# Altium PCB TI TPS56837.PcbDoc
Units mm, origin at the board's own origin, x right, y up, seen from the top; angles counter-clockwise.
Board outline 50 x 20 mm, 4 copper layers (Top Layer, Mid Layer 1, Mid Layer 2, Bottom Layer), stack 1.57 mm thick; 19 components, 10 nets, 49 pads, 53 vias.
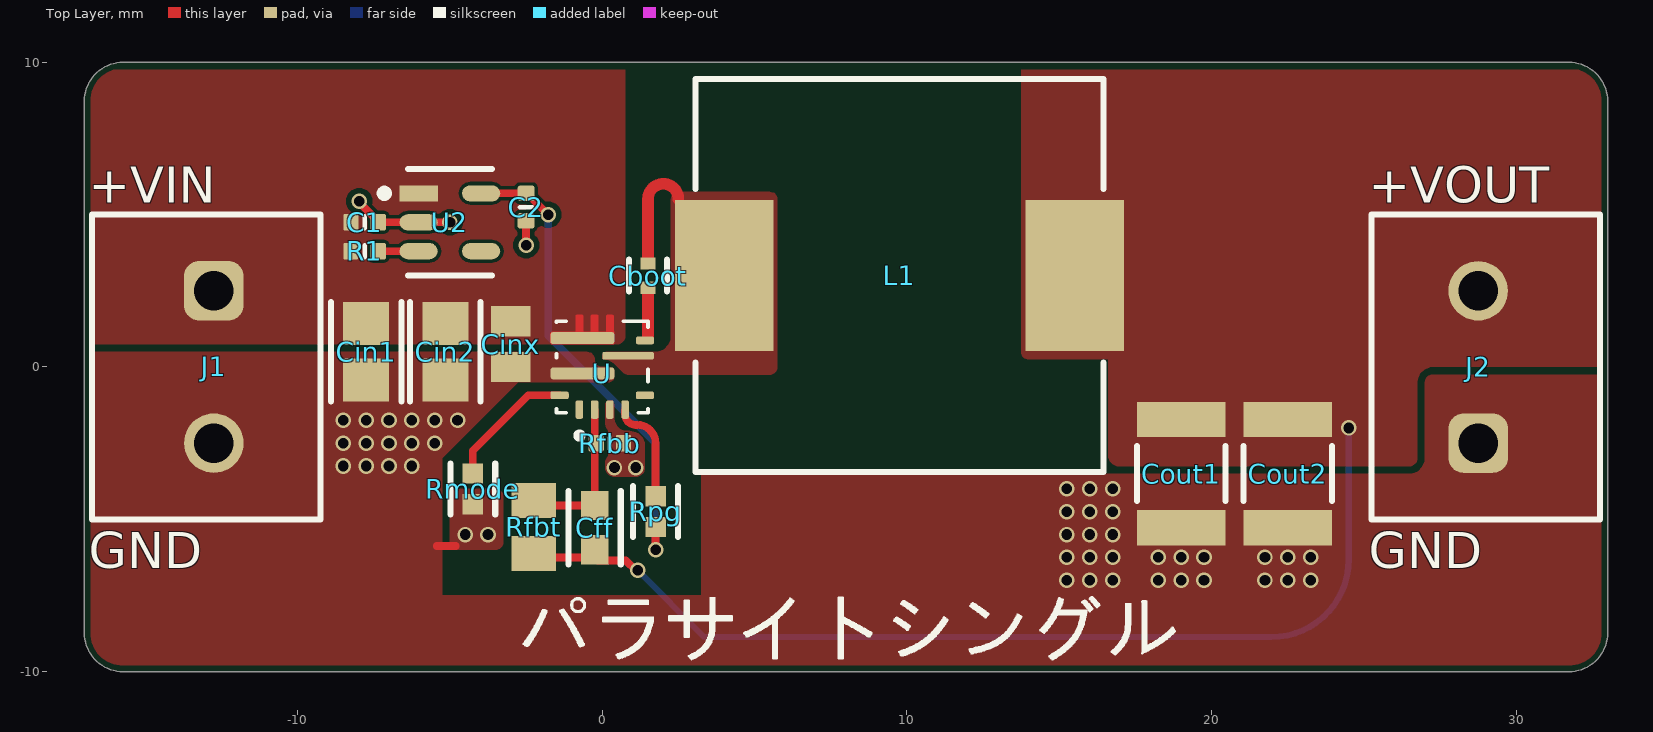
[diagram p0: Top Layer view]
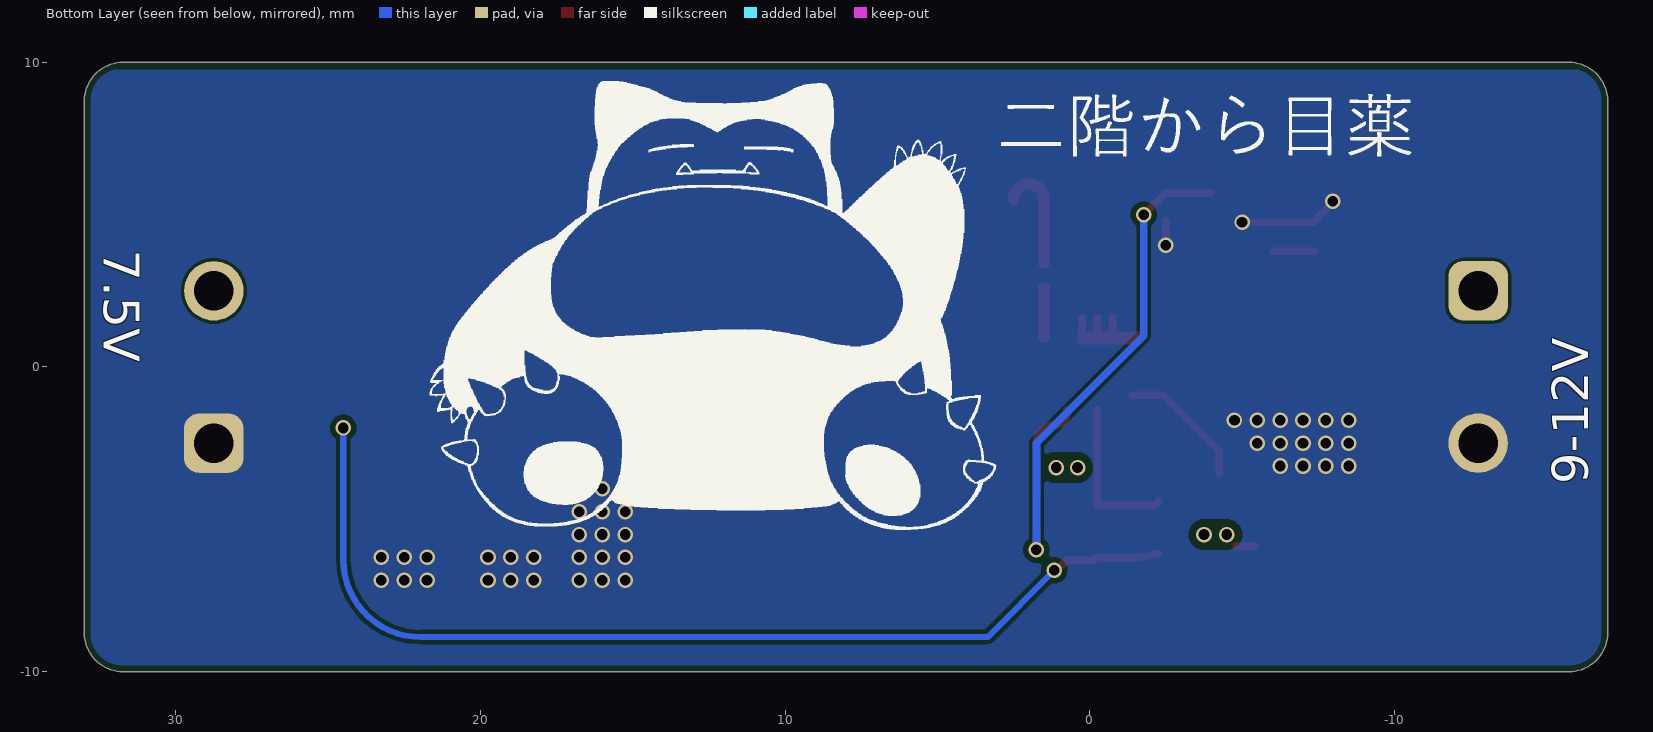
[diagram p1: Bottom Layer view, seen from below]
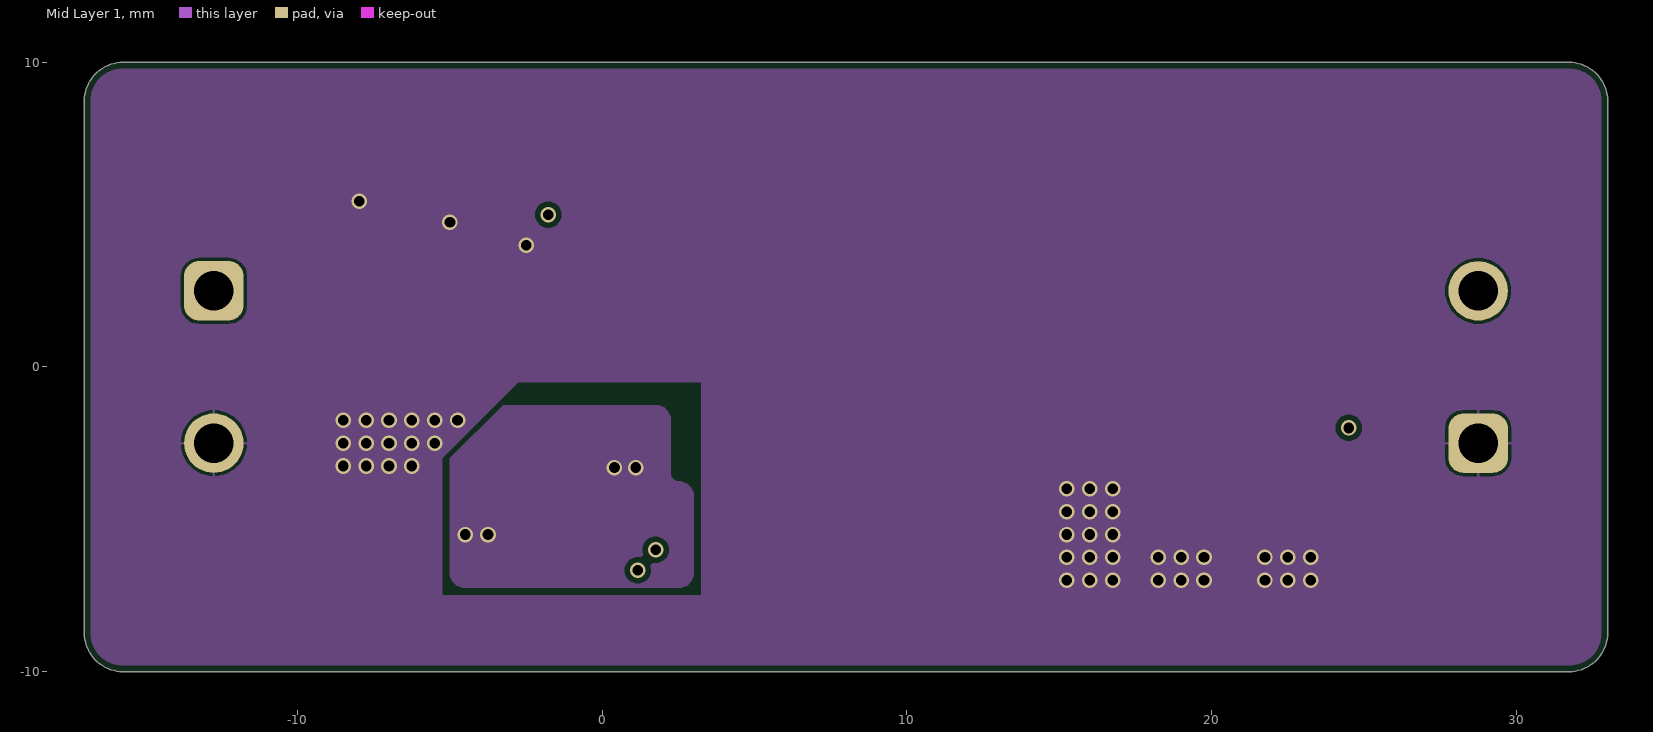
[diagram p2: Mid Layer 1]
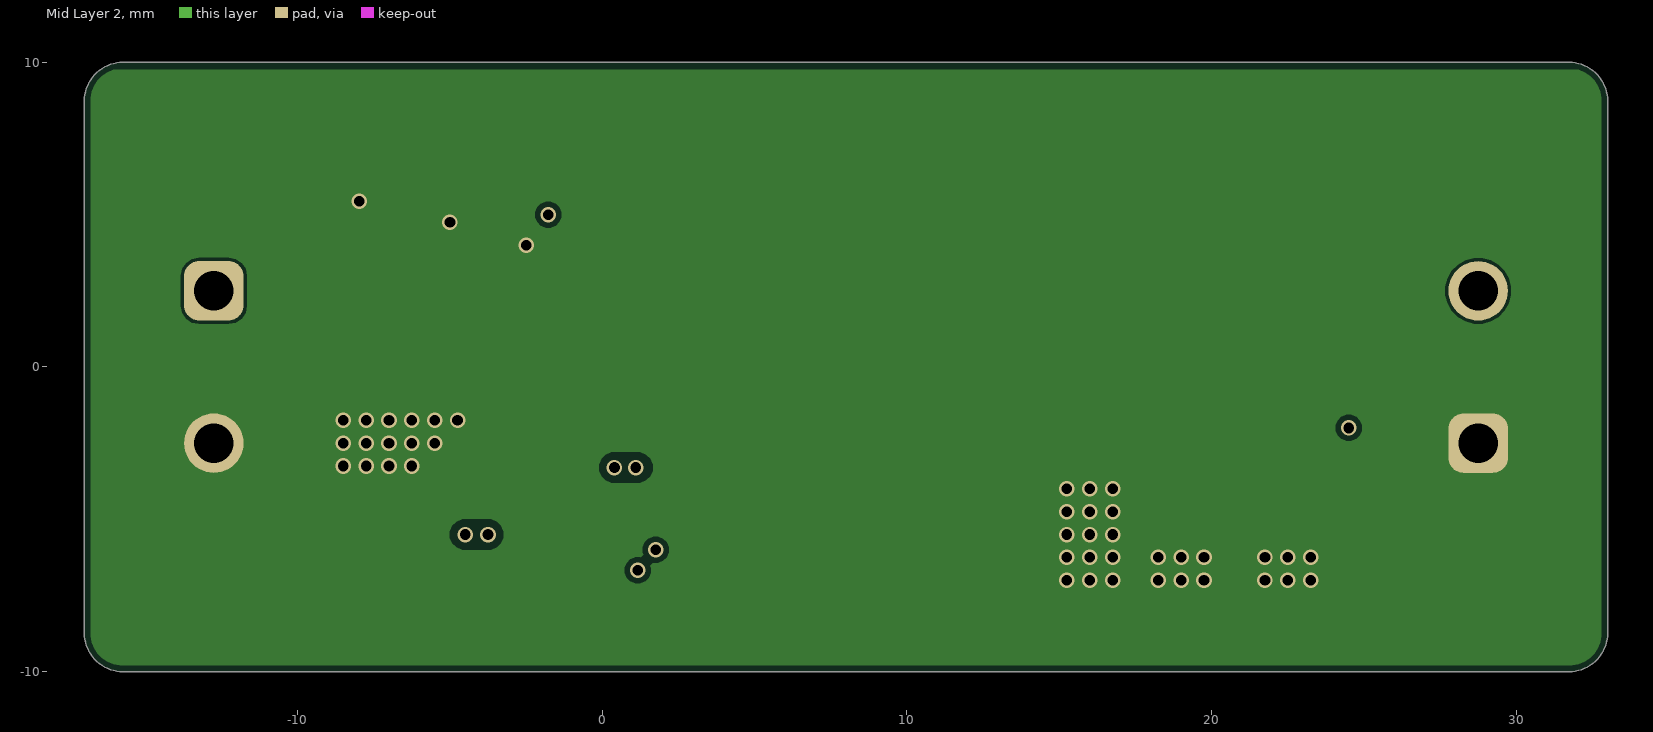
[diagram p3: Mid Layer 2]
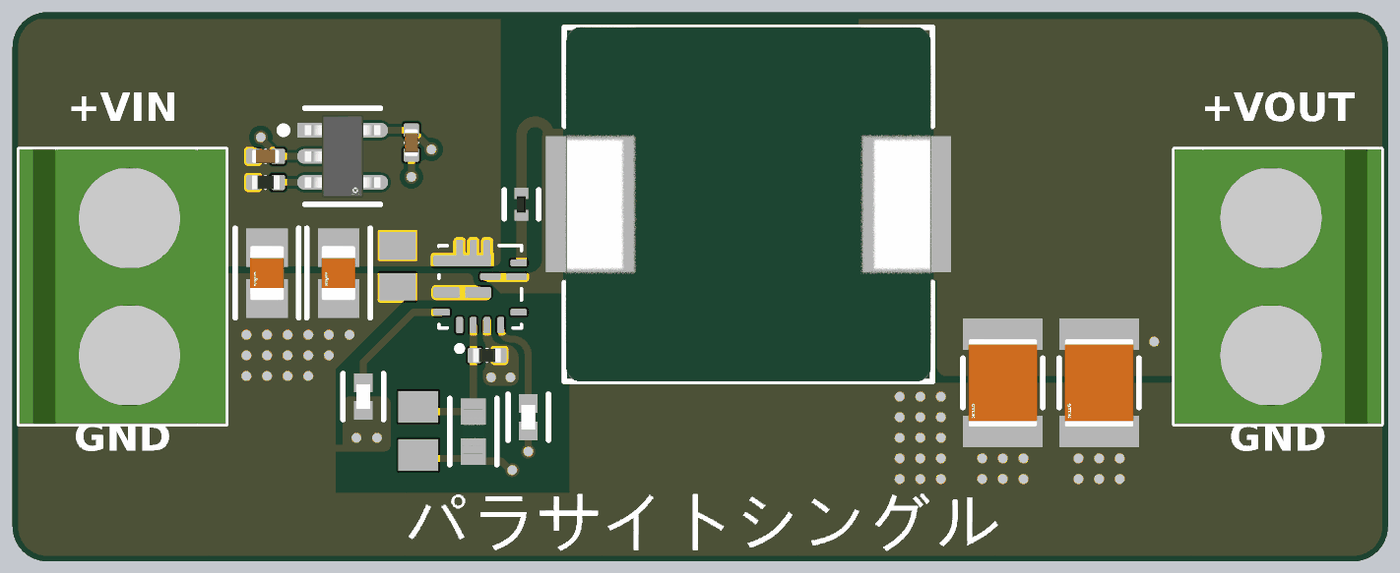
[diagram p4: 3D render of the assembled board from above, using the file's embedded part models]

## Layer stack, top to bottom
Top Solder: solder mask 0.0127, Solder Resist, Dk 3.8
Top Layer: signal copper 0.035
Dielectric 1: prepreg 0.1, 2313, Dk 4.05
Mid Layer 1: signal copper 0.0175
Core: core 1.265, FR-4, Dk 4.5
Mid Layer 2: signal copper 0.0175
Dielectric 2: prepreg 0.1, 2313, Dk 4.05
Bottom Layer: signal copper 0.035
Bottom Solder: solder mask 0.0127, Solder Resist, Dk 3.8

## Board outline
-17,-8.73 ccw(c-15.73,-8.73) -15.73,-10 31.73,-10 ccw(c31.73,-8.73) 33,-8.73 33,8.73 ccw(c31.73,8.73) 31.73,10 -15.73,10 ccw(c-15.73,8.73) -17,8.73

## Design rules (kind name [scope] priority, off if disabled: settings)
BoardOutlineClearance [All] p1: gap=0.2 ignorepadtopadclearanceinfootprint=FALSE
Clearance [All] p1: gap=0.102 ignorepadtopadclearanceinfootprint=FALSE except(0.127: Arc-Via Track-Via SMDPad-Via THPad-Via Via-Via Via-Fill Via-Poly Via-Region Via-Text; 0.25: Arc-Hole Track-Hole SMDPad-Hole THPad-Hole Via-Hole Fill-Hole Poly-Hole Region-Hole Text-Hole)
ComponentClearance [All] p1: gap=0.102 collisioncheckmode=3 verticalgap=0.102 showdistances=TRUE
DiffPairsRouting [All] p1: maxlimit=0.102 minlimit=0.102 mostfreqgap=0.102 toplayer_minwidth=0.102 toplayer_maxwidth=1816.048 toplayer_prefwidth=0.102 midlayer1_minwidth=0.102 midlayer1_maxwidth=1816.048 midlayer1_prefwidth=0.102 midlayer2_minwidth=0.102 midlayer2_maxwidth=1816.048 midlayer2_prefwidth=0.102 bottomlayer_minwidth=0.102 bottomlayer_maxwidth=1816.048 bottomlayer_prefwidth=0.102 maxuncoupledlength=12.7
Height [All] p1: minheight=0 maxheight=1816.048 prefheight=12.7
HoleSize [All] p1: absolutevalues=TRUE maxlimit=6.3 minlimit=0.2 maxpercent=80.000 minpercent=20.000
HoleToHoleClearance [All] p1: gap=0.25 allowstackedmicrovias=FALSE
MinimumAnnularRing [All] p1: minimumring=0.076
MinimumSolderMaskSliver [All] p1: minsoldermaskwidth=0
PlaneClearance [All] p1: clearance=0.102
PlaneConnect PlaneConnectPowerPads [InPadClass('PowerPads')] p1: planeconnectstyle=Direct reliefexpansion=0.508 reliefentries=4 reliefconductorwidth=0.254 reliefairgap=0.254
PlaneConnect [All] p2: pad.planeconnectstyle=Relief pad.reliefexpansion=0.3 pad.reliefentries=4 pad.reliefconductorwidth=0.102 pad.reliefairgap=0.102 via.planeconnectstyle=Direct via.reliefexpansion=0.3 via.reliefentries=4 via.reliefconductorwidth=0.127 via.reliefairgap=0.127
PolygonConnect PolygonConnect_2 [All vs IsNamedPolygon('+7V5_L01_P011') Or IsNamedPolygon('+12V_L01_P002') Or IsNamedPolygon('GND_L01_P001') Or IsNamedPolygon('GND_L01_P006') Or IsNamedPolygon('GND_L01_P007') Or IsNamedPolygon('SW_L01_P003') Or IsNamedPolygon('GND_L02_P009') Or IsNamedPolygon('GND_L03_P012') Or IsNamedPolygon('GND_L04_P013')] p1: connectstyle=Direct reliefconductorwidth=0.254 reliefentries=4 polygonreliefangle="90 Angle" airgapwidth=0.254
PolygonConnect PolygonConnect_1 [All vs IsNamedPolygon('+12_L01_P002') Or IsNamedPolygon('GND_L01_P001') Or IsNamedPolygon('GND_L01_P006') Or IsNamedPolygon('SW_L01_P003')] p2: connectstyle=Direct reliefconductorwidth=0.254 reliefentries=4 polygonreliefangle="90 Angle" airgapwidth=0.254
PolygonConnect PolygonConnectPowerPads [All vs (InPadClass('PowerPads'))] p3: connectstyle=Direct reliefconductorwidth=0.254 reliefentries=4 polygonreliefangle="90 Angle" airgapwidth=0.254
PolygonConnect [All] p4: thpad.connectstyle=Relief thpad.reliefconductorwidth=0.102 thpad.reliefentries=4 thpad.polygonreliefangle="90 Angle" thpad.airgapwidth=0.102 smdpad.connectstyle=Relief smdpad.reliefconductorwidth=0.102 smdpad.reliefentries=4 smdpad.polygonreliefangle="90 Angle" smdpad.airgapwidth=0.102 via.connectstyle=Direct via.reliefconductorwidth=0.127 via.reliefentries=4 via.polygonreliefangle="90 Angle" via.airgapwidth=0.127
RoutingVias [All] p1: holewidth=0.2 width=0.45 viastyle="Through Hole" minholewidth=0.2 minwidth=0.45 maxholewidth=6.3 maxwidth=6.55
SilkToSilkClearance [All] p1: silktosilkclearance=0
SilkToSolderMaskClearance [IsPad] p1: minsilkscreentomaskgap=0.102 clearancetoexposedcopper=TRUE
SolderMaskExpansion [All] p1: expansion=0.075 istentingtop=FALSE
Width [All] p1: maxlimit=1816.048 minlimit=0.102 preferedwidth=0.102
20 further rules are at their usual default settings.

## Classes and differential pairs
component class "TI TPS56837": C1 C2 Cff Cin1 Cin2 Cinx Cout1 Cout2 J1 J2 L1 R1 Rfbb Rfbt Rmode Rpg U2

## Components (designator, comment, footprint, x,y, rotation, side; value= is the part's Value field where it differs from the comment)
C1 "Capacitor 1µF +/-20% 10V 0402" CAPC0402(1005)60_L -7.8,4.75 r0 top value=1µF
C2 "Capacitor 1µF +/-20% 10V 0402" CAPC0402(1005)60_L -2.5,5.25 r270 top value=1µF
Cboot "GRM155R71C104KA88D" FP-GRM15-MFG 1.5,3 r90 top value=100nF
Cff "CL10C300FB8NNNC" FP-CL10-IPC_B -0.25,-5.273 r90 top value=30pF
Cin1 "GRM21BR61E106MA73L" FP-GRM21B-0_15-IPC_A -7.75,0.5 r270 top value=10uF
Cin2 "GRM21BR61E106MA73L" FP-GRM21B-0_15-IPC_A -5.15,0.5 r270 top value=10uF
Cinx "GRM21BR71H104KA01L" CAPC2013X135X45LL10T25 -3,0.75 r270 top value=100nF
Cout1 "C3225X5R1C156M250AA" FP-C3225-250-0_4-IPC_A 19,-3.5 r270 top value=15uF
Cout2 "C3225X5R1C156M250AA" FP-C3225-250-0_4-IPC_A 22.5,-3.5 r270 top value=15uF
J1 "691137710002" 691137710002 -13,0 r270 top
J2 "691137710002" 691137710002 29,0 r90 top
L1 "IHLP5050EZER4R7M01" FP-IHLP-5050EZ-FP_3_226x4-MFG 9.753,3 r0 top value=4.7uH
R1 "0R2J" RESC0402(1005)_L -7.8,3.8 r0 top value=0
Rfbb "Resistor 10K  +/-1 % 0402 63 mW" RESC0402(1005)_L 0.25,-2.5 r0 top value=10k
Rfbt "ERJ-6ENF1153V" RESC2013X70X40NL20T20 -2.25,-5.25 r90 top value=115kR
Rmode "CRCW040230K1FKED" FP-CRCW0402-e3-IPC_A -4.25,-4 r270 top value=30.1kR
Rpg "CRCW0402100KFKED" FP-CRCW0402-e3-IPC_A 1.75,-4.75 r90 top value=100kR
U "TPS56837RPAR" CONV_TPS56637RPAR 0,0 r90 top
U2 "NCP551SN50T1G" FP-483-IPC_C -5,4.75 r0 top

## Footprints (in the part's own frame and the unit in brackets; to place one, negate y for a bottom-side part, rotate by r counter-clockwise, add the part's x,y. Pads: shape width x height; smd on the part's side, far side on the other; paste and mask are expansions set on the pad)
691137710002 [mm] "Horizontal Cable Entry with Pressure Clamp, pitch 5mm, 02p"
  rrect50% 1.95x1.95 hole 1.3: 1(-2.5,0.25)
  round 1.95 hole 1.3: 2(2.5,0.25)
  silkscreen extent -5,-3.75 5,3.75, body extent -5,-3.75 5,3.75, height 11.6
CAPC0402(1005)60_L [mm] "Chip Capacitor, Body 1.0x0.5mm, Height 0.6mm, IPC High Density"
  rrect25% 0.5x0.55 smd: 1(-0.45,0) 2(0.45,0)
  silkscreen extent 0,-0.2 0,0.2, body extent -0.5,-0.25 0.5,0.25, height 0.6
CAPC2013X135X45LL10T25 [mm] "Chip Capacitor, 2-Leads, Body 2.00x1.25mm, IPC High Density"
  rect 1x1.3 smd: 1(-0.75,0) 2(0.75,0)
  body extent -1.05,-0.67 1.05,0.68, height 1.35
CONV_TPS56637RPAR [mm]
  rrect50% 0.6x0.25 smd: 1(-1.4,0.75) 2(-1.4,0.25) 3(-1.4,-0.25) 4(-1.4,-0.75)
  rrect50% 0.25x0.6 smd: 5(-0.93,-1.4) 7(0.87,-1.4) 10(-0.93,1.4)
  rrect50% 0.25x1.7 smd paste-2: 6(0.37,-0.85)
  rrect50% 0.4x2.1 smd paste-2 mask+0: 8(0.95,0.65)
  rrect50% 0.4x2.1 smd paste-2: 9(-0.21,0.65)
  Top Layer region: 287 vertices and 0 holes, not listed, extent 0.75,-0.4 1.711,1.7
  silkscreen extent -2.35,-1.5 1.5,1.5
FP-483-IPC_C [mm]
  rect 1.254x0.53 smd paste+0 mask+0: 1(-1.025,0.95)
  rrect100% 1.254x0.53 smd paste+0 mask+0: 2(-1.025,0) 3(-1.025,-0.95) 4(1.025,-0.95) 5(1.025,0.95)
  silkscreen extent -2.28,-1.75 1.38,1.75, body extent -1.75,-1.6 1.75,1.6, height 0.25
FP-C3225-250-0_4-IPC_A [mm]
  rect 1.153x2.904 smd paste+0 mask+0: 1(-1.775,0) 2(1.775,0)
  silkscreen extent -0.9,-1.45 0.9,1.45, body extent -2.85,-1.95 2.85,1.95, height 0.25
FP-CL10-IPC_B [mm]
  rect 0.958x0.912 smd paste+0 mask+0: 1(-0.727,0) 2(0.727,0)
  silkscreen extent -1.21,-0.86 1.21,0.86, body extent -1.46,-0.71 1.46,0.71, height 0.25
FP-CRCW0402-e3-IPC_A [mm]
  rect 0.668x0.672 smd paste+0 mask+0: 1(-0.502,0) 2(0.502,0)
  silkscreen extent -0.84,-0.74 0.84,0.74, body extent -1.04,-0.54 1.04,0.54, height 0.25
FP-GRM15-MFG [mm]
  rect 0.4x0.5 smd paste+0 mask+0: 1(-0.4,0) 2(0.4,0)
  silkscreen extent -0.53,-0.63 0.53,0.63, body extent -0.7,-0.38 0.7,0.38, height 0.25
FP-GRM21B-0_15-IPC_A [mm]
  rect 1.406x1.508 smd paste+0 mask+0: 1(-0.926,0) 2(0.926,0)
  silkscreen extent -1.63,-1.15 1.63,1.15, body extent -2.13,-1.25 2.13,1.25, height 0.25
FP-IHLP-5050EZ-FP_3_226x4-MFG [mil]
  rect 127.01x195 smd paste+0 mask+0: 1(-226.5,0) 2(226.5,0)
  silkscreen extent -264,-254 264,254, body extent -294,-258 294,258, height 10
RESC0402(1005)_L [mm] "Chip Resistor, Body 1.0x0.5mm, IPC High Density"
  rrect25% 0.5x0.55 smd: 1(-0.45,0) 2(0.45,0)
  silkscreen extent 0,-0.2 0,0.2, body extent -0.5,-0.25 0.5,0.25, height 0.3
RESC2013X70X40NL20T20 [mm] "Chip Resistor, 2-Leads, Body 2.00x1.25mm, IPC Medium Density"
  rect 1.15x1.45 smd: 1(-0.875,0) 2(0.875,0)
  body extent -1.1,-0.72 1.1,0.72, height 0.7

## Part data
C1 C2: library part CMP-001-00063-3, "Chip Capacitor, 1µF +/-20%, 10V, 0402, Thickness 0.6 mm", Case/Package=0402, Max Operating Temperature=85°C, Min Operating Temperature=-55°C, Tolerance=10%, Voltage Rating=10V, Mounting Technology=SMT, Pins=2
Cboot: library part CMP-001-00088-1, "Multilayer Ceramic Capacitor, 0.1 uF, 16 V, ± 10%, X7R, 0402 [1005 Metric]", Case Code (Imperial)=0402, Case Code (Metric)=1005, Dielectric=X7R, Dielectric Material=Ceramic, Max Operating Temperature=125°C, Min Operating Temperature=-55°C, Package Quantity=1, Tolerance=10%, Voltage=16V, Case/Package=0402, Depth=0.5mm, Height=0.5mm, Lead Free="Lead Free", Length=1mm, Material=Ceramic, Mounting Technology="Surface Mount", Packaging="Tape and Reel", Pins=2, Radiation Hardening=No, Reach SVHC Compliant=Unknown, RoHS Compliant=Yes, Series=GRM, Termination=SMD/SMT, Thickness=0.022inch, Voltage Rating=16V, Voltage Rating (DC)=16V, Width=0.02inch
Cff: library part CMP-001-00089-1, "Cap Ceramic 30pF 50V C0G 1% SMD 0603 125°C Paper T/R", Case Code (Imperial)=0603, Case Code (Metric)=1608, Dielectric=C0G, Max Operating Temperature=125°C, Min Operating Temperature=-55°C, Package Quantity=1, Tolerance=1%, Voltage Rating=50V, Case/Package=0603, Depth=0.8mm, Length=0.063inch, Mounting Technology="Surface Mount", Packaging="Tape and Reel", Radiation Hardening=No, RoHS Compliant=Yes, Series=CL, Thickness=0.035inch, Voltage Rating (DC)=50V, Width=0.031inch
Cin1 Cin2: library part CMP-001-00085-1, "Multilayer Ceramic Capacitor, 10 uF, 25 V, ± 20%, X5R, 0805 [2012 Metric]", Case Code (Imperial)=0805, Case Code (Metric)=2012, Dielectric=X5R, Max Operating Temperature=85°C, Min Operating Temperature=-55°C, Package Quantity=3000, Tolerance=20%, Voltage Rating=25V, Case/Package=0805, Height=1.25mm, Lead Free="Lead Free", Length=0.079inch, Material=Ceramic, Mounting Technology="Surface Mount", Packaging="Tape and Reel", Reach SVHC Compliant=No, RoHS Compliant=Yes, Series=GRM, Termination=SMD/SMT, Thickness=0.055inch, Voltage Rating (DC)=25V, Weight=0.000335oz, Width=0.049inch
Cinx: library part CMP-001-00090-1, "CAP CER 0.1UF 50V X7R 0805 / Cap Ceramic 0.1uF 50V X7R 10% Pad SMD 0805 125¡ãC T/R", Case Code (Imperial)=0805, Case Code (Metric)=2012, Dielectric=X7R, Dielectric Material=Ceramic, Insulation Resistance=10GR, Max Operating Temperature=125°C, Min Operating Temperature=-55°C, Package Quantity=1, Tolerance=10%, Voltage=50V, Case/Package=0805, Depth=1.25mm, Height=1.25mm, Lead Free="Lead Free", Length=2mm, Material=Ceramic, Mounting Technology="Surface Mount", Packaging="Tape and Reel", Pins=2, Reach SVHC Compliant=No, RoHS Compliant=Yes, Series=GRM, Termination=SMD/SMT, Thickness=0.053inch, Voltage Rating=50V, Voltage Rating (DC)=50V, Width=0.049inch
Cout1 Cout2: library part CMP-001-00086-1, Case Code (Imperial)=1210, Case Code (Metric)=3225, Dielectric=X5R, Dielectric Material=Ceramic, Max Operating Temperature=85°C, Min Operating Temperature=-55°C, Package Quantity=1000, Tolerance=20%, Voltage Rating=16V, Case/Package=1210, Construction=Flat, Depth=2.5mm, Height=2mm, Lead Free="Lead Free", Length=3.2mm, Material=Ceramic, Mounting Technology="Surface Mount", Packaging="Tape and Reel", RoHS Compliant=Yes, Series=C, Termination=SMD/SMT, Thickness=0.11inch, Voltage Rating (DC)=16V, Weight=0.000564oz, Width=0.098inch
J1 J2: library part CMP-002-00088-1, "Series 1377 - 5.00 mm Horizontal Entry with Pressure Clamp WR-TBL, 2 pin", Color=Green, Current=16A, Max Operating Temperature=120°C, Min Operating Temperature=-30°C, Voltage=300V, Contact Material=Nickel,Tin, Current Rating=16A, Height=11.6mm, Housing Material=PC, Lead Pitch=5mm, Mounting Technology="Through Hole", Number of Contacts=2, Number of Levels=1, Number of Positions Per Level=2, Number of Rows=1, Pins=2, Plating="Copper Alloy,ZINC PLATED", RoHS Compliant=Yes, Series="WR-TBL Series 1377", Termination=Screw, Voltage Rating=300V, Wire Gauge (Max)=30AWG, Wire Gauge (Min)=12AWG
L1: library part CMP-006-00021-1, "Inductor Power Shielded Wirewound 4.7uH 20% 100KHz Powdered Iron 12A 15mOhm DCR 5050 T/R", Case/Package=5050, Current Rating=12A, DC Resistance (DCR)=15mR, Inductance Tolerance=20%, Max DC Current=27A, Max Operating Temperature=125°C, Min Operating Temperature=-55°C, Package Quantity=250, Self Resonant Frequency=5MHz, Test Frequency=100kHz, Core Material=Ferrite, Depth=12.9mm, Height=5mm, Lead Free="Lead Free", Length=13.2mm, Max Current Rating=12A, Military Standard=Not, Mounting Technology="Surface Mount", Packaging="Tape and Reel", Pins=2, Radiation Hardening=No, Reach SVHC Compliant=Unknown, RMS Current (Irms)=12A, RoHS Compliant=Yes, Saturation Current=27A, Series=IHLP-5050EZ-01, Shielding=Shielded, Termination=SMD/SMT, Tolerance=20%, Width=12.9mm
R1: library part CMP-009-00062-2, "Jumper 0402 (1005 Metric)", Case/Package=0402, Mounting Technology=SMT, Pins=2
Rfbb: library part CMP-009-00149-3, "Chip Resistor, 10 kOhms, +/-1 %, 63 mW, -55 to 125 degC, 0402", Case/Package=0402, Max Operating Temperature=155°C, Min Operating Temperature=-55°C, Power=63mW, Tolerance=1%, Pins=2
Rfbt: library part CMP-009-00188-1, "Res Thick Film 0805 115K Ohm 1% 0.125W ±100ppm/°C Molded SMD Punched Carrier T/R", Case Code (Imperial)=0805, Case Code (Metric)=2012, Max Operating Temperature=155°C, Max Power Dissipation=125mW, Min Operating Temperature=-55°C, Package Quantity=1, Resistance Tolerance=1%, Resistor Type="Thick Film", Temperature Coefficient=100ppm/°C, Voltage Rating=150V, Case/Package=0805, Contact Plating=Tin, Features="Automotive AEC-Q200", Height=0.028inch, Lead Free="Lead Free", Length=0.079inch, Mounting Technology="Surface Mount", Number of Terminations=2, Packaging="Tape and Reel", Power Rating=125mW, Reach SVHC Compliant=Yes, RoHS Compliant=Yes, Series=ERJ, Termination=SMD/SMT, Tolerance=1%, Voltage Rating (DC)=150V, Weight=0.000194oz, Width=1.2mm
Rmode: library part CMP-009-00189-1, "SMD Chip Resistor, 30.1 kOhm, ± 1%, 63 mW, 0402 [1005 Metric], Thick Film, General Purpose", Case Code (Imperial)=0402, Case Code (Metric)=1005, Max Operating Temperature=155°C, Max Power Dissipation=63mW, Min Operating Temperature=-55°C, Package Quantity=10, Resistance Tolerance=1%, Resistor Type="Thick Film", Temperature Coefficient=100ppm/°C, Voltage Rating=50V, Case/Package=0402, Construction=Rectangular, Contact Plating=Tin, Depth=0.5mm, Features="Automotive AEC-Q200", Height=0.35mm, Lead Free="Lead Free", Length=1mm, Military Standard=Not, Number of Terminations=2, Packaging="Tape and Reel", Pins=2, Power Rating=63mW, Radiation Hardening=No, Reach SVHC Compliant=Unknown, RoHS Compliant=Yes, Series=CRCW, Technology="THICK FILM", Termination=SMD/SMT, Tolerance=1%, Voltage Rating (DC)=50V, Weight=2.3E-05oz, Width=0.02inch
Rpg: library part CMP-009-00190-1, "SMD Chip Resistor, 100 kOhm, ± 1%, 63 mW, 0402 [1005 Metric], Thick Film, General Purpose", Case Code (Imperial)=0402, Case Code (Metric)=1005, Max Operating Temperature=155°C, Max Power Dissipation=63mW, Min Operating Temperature=-55°C, Package Quantity=10000, Ratings=AEC-Q200, Resistance Tolerance=1%, Resistor Type="Thick Film", Temperature Coefficient=100ppm/°C, Voltage Rating=50V, Case/Package=0402, Construction=Rectangular, Contact Plating=Tin, Depth=0.5mm, Features="Automotive AEC-Q200", Height=0.35mm, Lead Free="Lead Free", Length=1mm, Military Standard=Not, Number of Terminations=2, Packaging="Tape and Reel", Pins=2, Power Rating=63mW, Radiation Hardening=No, Reach SVHC Compliant=Unknown, RoHS Compliant=Yes, Series=CRCW, Technology="THICK FILM", Termination=SMD/SMT, Tolerance=1%, Voltage Rating (DC)=50V, Weight=2.3E-05oz, Width=0.5mm
U: library part CMP-034-000000-3, "4.5-V to 28-V input, 8-A synchronous buck converter 10-VQFN-HR -40 to 150", Package="PowerVFQFN-10 Texas Instruments", Availability=Unavailable, Component Type=Standard, Design Item ID=TPS56637RPAR, MF="Texas Instruments", MP=TPS56637RPAR, Pin Count=9, Price=None, SnapEDA_Link=https://www.snapeda.com/parts/TPS56637RPAR/Texas%20Instruments/view-part/3595662/?ref=snap, Source=SnapEDAsch.SchLib
U2: library part CMP-019-00051-1, "NCP551SN50T1G; LDO Voltage Regulator; 150mA; 5 V 2%; 0 to 12 Vin; 5-Pin TSOP", Case/Package=TSOP, Dropout Voltage=40mV, Input Bias Current=4uA, Max Operating Temperature=85°C, Max Output current=150mA, Max Output Voltage=5.1V, Max Supply Voltage=12V, Min Input Voltage=0V, Min Operating Temperature=-40°C, Min Output Voltage=5V, Package Quantity=1, Quiescent Current=8uA, Accuracy=2%, Halogen Free="Halogen Free", Height=1mm, Lead Free="Lead Free", Length=3mm, Min Supply Voltage=0V, Mounting Technology="Surface Mount", Nominal Output Voltage=5V, Number of Outputs=1, Number of Regulators=1, Output Current=150mA, Output Type=Fixed, Output Voltage=5V, Packaging="Tape and Reel", Pins=5, Polarity=Positive, Radiation Hardening=No, Reach SVHC Compliant=No, RoHS Compliant=Yes, Series=-, Termination=SMD/SMT, Width=1.5mm

## Via types
v1: diameter 0.51, hole 0.35, Top Layer to Bottom Layer, tented both sides, 53 vias

## Nets (pads, with @x,y where several pads share a name; then routed paths per layer and width w, separated by ;. In a path a pad name is that pad's centre, name@x,y a point inside that pad or via, vN(x,y) a via of type N, cw(c..) or ccw(c..) an arc to the next point about the centre after c; other vN are vias at no path point)
+5V: C2.1 Rpg.1 U2.5 | length 15.7
  Top Layer w0.254: U2.5 -3.612,5.7 C2.1 -2.475,5.7 v1(-1.775,5) ; v1(1.75,-6) Rpg.1
  Bottom Layer w0.254: v1(-1.775,5) -1.775,1.025 1.75,-2.5 v1(1.75,-6)
+7V5: Cff.1 Cout1.1 Cout2.1 J2.2 L1.2 Rfbt.1 | length 33.6
  Top Layer w0.254: Rfbt.1 -1.652,-6.25 -0.25,-6.25 -0.148,-6.352 0.773,-6.352 1.096,-6.675 v1(1.165,-6.675)
  Bottom Layer w0.203: v1(1.165,-6.675) 3.355,-8.864 21.96,-8.864 ccw(c21.96,-6.324) 24.5,-6.324 v1(24.5,-2)
+12V: C1.1 Cin1.1 Cin2.1 Cinx.1 J1.1 R1.1 U2.1 U.8
GND: C1.2 C2.2 Cin1.2 Cin2.2 Cinx.2 Cout1.2 Cout2.2 J1.2 J2.1 Rfbb.2 Rmode.2 U2.2 U.3 U.9 | length 4.7
  Top Layer w0.254: v1(-7.974,5.442) -7.974,5.399 -7.35,4.775 C1.2 U2.2 v1(-5,4.75) ; -5.434,-5.875 -4.809,-5.875 ; v1(-2.5,4) C2.2
  other v1: 15.25,-7 16,-7 16.75,-7 18.25,-7 19,-7 19.75,-7 21.75,-7 22.5,-7 23.25,-7 15.25,-6.25 16,-6.25 16.75,-6.25 18.25,-6.25 19,-6.25 19.75,-6.25 21.75,-6.25 22.5,-6.25 23.25,-6.25 -4.5,-5.5 -3.75,-5.5 15.25,-5.5 16,-5.5 16.75,-5.5 15.25,-4.75 16,-4.75 16.75,-4.75 15.25,-4 16,-4 16.75,-4 0.4,-3.3 1.1,-3.3 -8.5,-3.25 -7.75,-3.25 -7,-3.25 -6.25,-3.25 -8.5,-2.5 -7.75,-2.5 -7,-2.5 -6.25,-2.5 -5.5,-2.5 -8.5,-1.75 -7.75,-1.75 -7,-1.75 -6.25,-1.75 -5.5,-1.75 -4.75,-1.75
"Net Rfbb_1": Cff.2 Rfbb.1 Rfbt.2 U.2 | length 5.3
  Top Layer w0.254: Rfbt.2 ccw(c-2.079,-4.375) -2.079,-4.546 Cff.2 -0.25,-2.55 Rfbb.1 ; Rfbb.1@-0.25,-2.5 U.2
NetCboot_1: Cboot.1 U.7 | length 1.6
  Top Layer w0.381: U.7@1.5,0.97 Cboot.1
NetR1_2: R1.2 U2.3 | length 1.3
  Top Layer w0.254: R1.2 U2.3
NetRmode_1: Rmode.1 U.10 | length 4.4
  Top Layer w0.254: Rmode.1 -4.25,-2.75 -2.43,-0.93 U.10
NetRpg_2: Rpg.2 U.4 | length 3.4
  Top Layer w0.254: U.4 0.75,-1.55 ccw(c1.1,-1.55) 1.1,-1.9 1.15,-1.9 cw(c1.15,-2.5) 1.75,-2.5 Rpg.2
SW: Cboot.2 L1.1 U.6 | length 3.7
  Top Layer w0.381: Cboot.2 1.5,5.499 ; 1.5,5.509 cw(c2,5.511) 2.5,5.5
pads on no net: U2.4 U.1 U.5

## Polygon pours and split planes (outlines as drawn)
+12V on Top Layer "+12V_L01_P002" (solid, remove dead copper, pour order 2): 0.5,0.75 ccw(c0.5,1) 0.75,1 0.75,9.75 -18,9.75 -18,0.75
+7V5 on Top Layer "+7V5_L01_P011" (solid, remove dead copper, pour order 11): 16.95,-3.25 26.5,-3.25 ccw(c26.5,-3) 26.75,-3 26.75,-0.5 cw(c27.25,-0.5) 27.25,0 35,0 35,9.75 13.75,9.75 13.75,0.5 ccw(c14,0.5) 14,0.25 16.6,0.25 16.6,-2.9 ccw(c16.95,-2.9)
GND on Top Layer "GND_L01_P001" (solid, remove dead copper, pour order 1): 0.4,-0.3 0.4,-0.15 ccw(c0.25,-0.15) 0.25,0 0,0 cw(c0,0.25) -0.25,0.25 ccw(c-0.5,0.25) -0.5,0.5 -1.5,0.5 -1.75,0.5 -18,0.5 -18,-11 35,-11 35,-0.25 27.25,-0.25 ccw(c27.25,-0.5) 27,-0.5 27,-3 cw(c26.5,-3) 26.5,-3.5 3.25,-3.5 3.25,-7.5 -5.25,-7.5 -5.25,-3 -2.75,-0.5 0.2,-0.5 ccw(c0.2,-0.3)
SW on Top Layer "SW_L01_P003" (solid, remove dead copper, pour order 3): 0,0.45 0,0.302 ccw(c0.054,0.302) 0.05,0.248 cw(c0,-0.353) 0.427,0.073 0.69,-0.19 ccw(c0.835,-0.044) 0.835,-0.25 5.5,-0.25 ccw(c5.5,0) 5.75,0 5.75,5.5 ccw(c5.5,5.5) 5.5,5.75 2.5,5.75 ccw(c2.5,5.5) 2.25,5.5 2.25,1 cw(c1.75,1) 1.75,0.5 0.05,0.5 ccw(c0.05,0.45)
GND on Top Layer "GND_L01_P007" (solid, remove dead copper, pour order 7): -5,-6 -3.5,-6 ccw(c-3.5,-5.75) -3.25,-5.75 -3.25,-4.25 ccw(c-3.5,-4.25) -3.5,-4 -4.75,-4 ccw(c-4.75,-4.25) -5,-4.25
GND on Top Layer "GND_L01_P006" (solid, remove dead copper, pour order 6): 0.2,-1.1 0.3,-1.1 cw(c0.3,-1.2) 0.4,-1.2 0.4,-1.7 ccw(c0.8,-1.7) 0.8,-2.1 0.9,-2.1 cw(c0.9,-2.6) 1.4,-2.6 1.4,-3.3 cw(c1.1,-3.3) 1.1,-3.6 0.4,-3.6 cw(c0.4,-3.3) 0.1,-3.3 0.1,-3.1 cw(c0.2,-3.1) 0.12,-3.04 ccw(c-0.199,-2.8) 0.2,-2.8 0.2,-2.2 ccw(c-0.199,-2.2) 0.12,-1.96 cw(c0.2,-1.9) 0.1,-1.9 0.1,-1.2 cw(c0.2,-1.2)
GND on Mid Layer 1 "GND_L02_P015" (solid, remove dead copper, pour order 15): 3.25,9.796 33.5,10 33.5,-10 3.25,-10 3.25,-9.75
GND on Mid Layer 1 "GND_L02_P014" (solid, remove dead copper, pour order 14): 3.25,-10 3.25,-7.5 -5.25,-7.5 -5.25,-3 -2.75,-0.5 3.25,-0.5 3.25,10 -17.25,10 -17.25,-10
GND on Mid Layer 1 "GND_L02_P009" (solid, remove dead copper, pour order 9): 2.25,-7.25 2.5,-7.25 ccw(c2.5,-6.75) 3,-6.75 3,-4.25 ccw(c2.5,-4.25) 2.5,-3.75 cw(c2.5,-3.5) 2.25,-3.5 2.25,-1.75 ccw(c1.75,-1.75) 1.75,-1.25 -3.25,-1.25 -5,-3 -5,-6.75 ccw(c-4.5,-6.75) -4.5,-7.25
GND on Mid Layer 2 "GND_L03_P012" (solid, remove dead copper, pour order 12): -17.25,9.75 -17.25,-11 34.25,-11 34.25,9.75
GND on Bottom Layer "GND_L04_P013" (solid, remove dead copper, pour order 13): -17.25,9.75 -17.25,-11 34.25,-11 34.25,9.75

## Other copper
Mid Layer 2:
  pour cut-out: 0.4,-2.8 ccw(c0.4,-3.3) -0.1,-3.3 ccw(c0.4,-3.3) 0.4,-3.8 ccw(c0.4,-3.3) 0.9,-3.3 ccw(c0.4,-3.3) 0.4,-2.8
  pour cut-out: 1.15,-2.8 ccw(c1.15,-3.3) 0.65,-3.3 ccw(c1.15,-3.3) 1.15,-3.8 ccw(c1.15,-3.3) 1.65,-3.3 ccw(c1.15,-3.3) 1.15,-2.8
  pour cut-out: -4.5,-5 ccw(c-4.5,-5.5) -5,-5.5 ccw(c-4.5,-5.5) -4.5,-6 ccw(c-4.5,-5.5) -4,-5.5 ccw(c-4.5,-5.5) -4.5,-5
  pour cut-out: -3.75,-5 ccw(c-3.75,-5.5) -4.25,-5.5 ccw(c-3.75,-5.5) -3.75,-6 ccw(c-3.75,-5.5) -3.25,-5.5 ccw(c-3.75,-5.5) -3.75,-5
  pour cut-out: 1.15,-2.8 0.4,-2.8 0.4,-3.8 1.15,-3.8
  pour cut-out: -3.75,-5 -4.5,-5 -4.5,-6 -3.75,-6
Bottom Layer:
  pour cut-out: 1.15,-2.8 ccw(c1.15,-3.3) 0.65,-3.3 ccw(c1.15,-3.3) 1.15,-3.8 ccw(c1.15,-3.3) 1.65,-3.3 ccw(c1.15,-3.3) 1.15,-2.8
  pour cut-out: 0.4,-2.8 ccw(c0.4,-3.3) -0.1,-3.3 ccw(c0.4,-3.3) 0.4,-3.8 ccw(c0.4,-3.3) 0.9,-3.3 ccw(c0.4,-3.3) 0.4,-2.8
  pour cut-out: -3.75,-5 ccw(c-3.75,-5.5) -4.25,-5.5 ccw(c-3.75,-5.5) -3.75,-6 ccw(c-3.75,-5.5) -3.25,-5.5 ccw(c-3.75,-5.5) -3.75,-5
  pour cut-out: -4.5,-5 ccw(c-4.5,-5.5) -5,-5.5 ccw(c-4.5,-5.5) -4.5,-6 ccw(c-4.5,-5.5) -4,-5.5 ccw(c-4.5,-5.5) -4.5,-5
  pour cut-out: 1.15,-2.8 0.4,-2.8 0.4,-3.8 1.15,-3.8
  pour cut-out: -3.75,-5 -4.5,-5 -4.5,-6 -3.75,-6

## Silkscreen, mask and mechanical layers (free items; w line width, h text height)
Top Overlay:
  drawing of 18 lines, arcs and shapes, not listed
  text "+VIN" at -16.85,5 h2.03
  text "+VOUT" at 25.15,5 h2.03
  text "GND" at -16.85,-7 h2.03
  text "GND" at 25.15,-7 h2.03
Bottom Overlay:
  drawing of 24 lines, arcs and shapes, not listed
  text "7.5V" at 32.75,3.85 h2.03 r90
  text "9-12V" at -16.75,-3.85 h2.03 r270
Mechanical 1:
  lines w0.001: -17,-8.73 ccw(c-15.73,-8.73) -15.73,-10 3.75,-10 11,-10 31.48,-10 31.73,-10 ccw(c31.73,-8.73) 33,-8.73 33,-0.25 33,8.73 ccw(c31.73,8.73) 31.73,10 31.48,10 11,10 -15.73,10 ccw(c-15.73,8.73) -17,8.73 -17,0.75 -17,-8.73